# Altium PCB micromouse.PcbDoc (part 1 of 2)
Units mil, origin at the board's own origin, x right, y up, seen from the top; angles counter-clockwise.
Board outline 2757.75 x 3935.86 mil, 2 copper layers (Top, Bottom); 175 components, 116 nets, 552 pads, 234 vias.
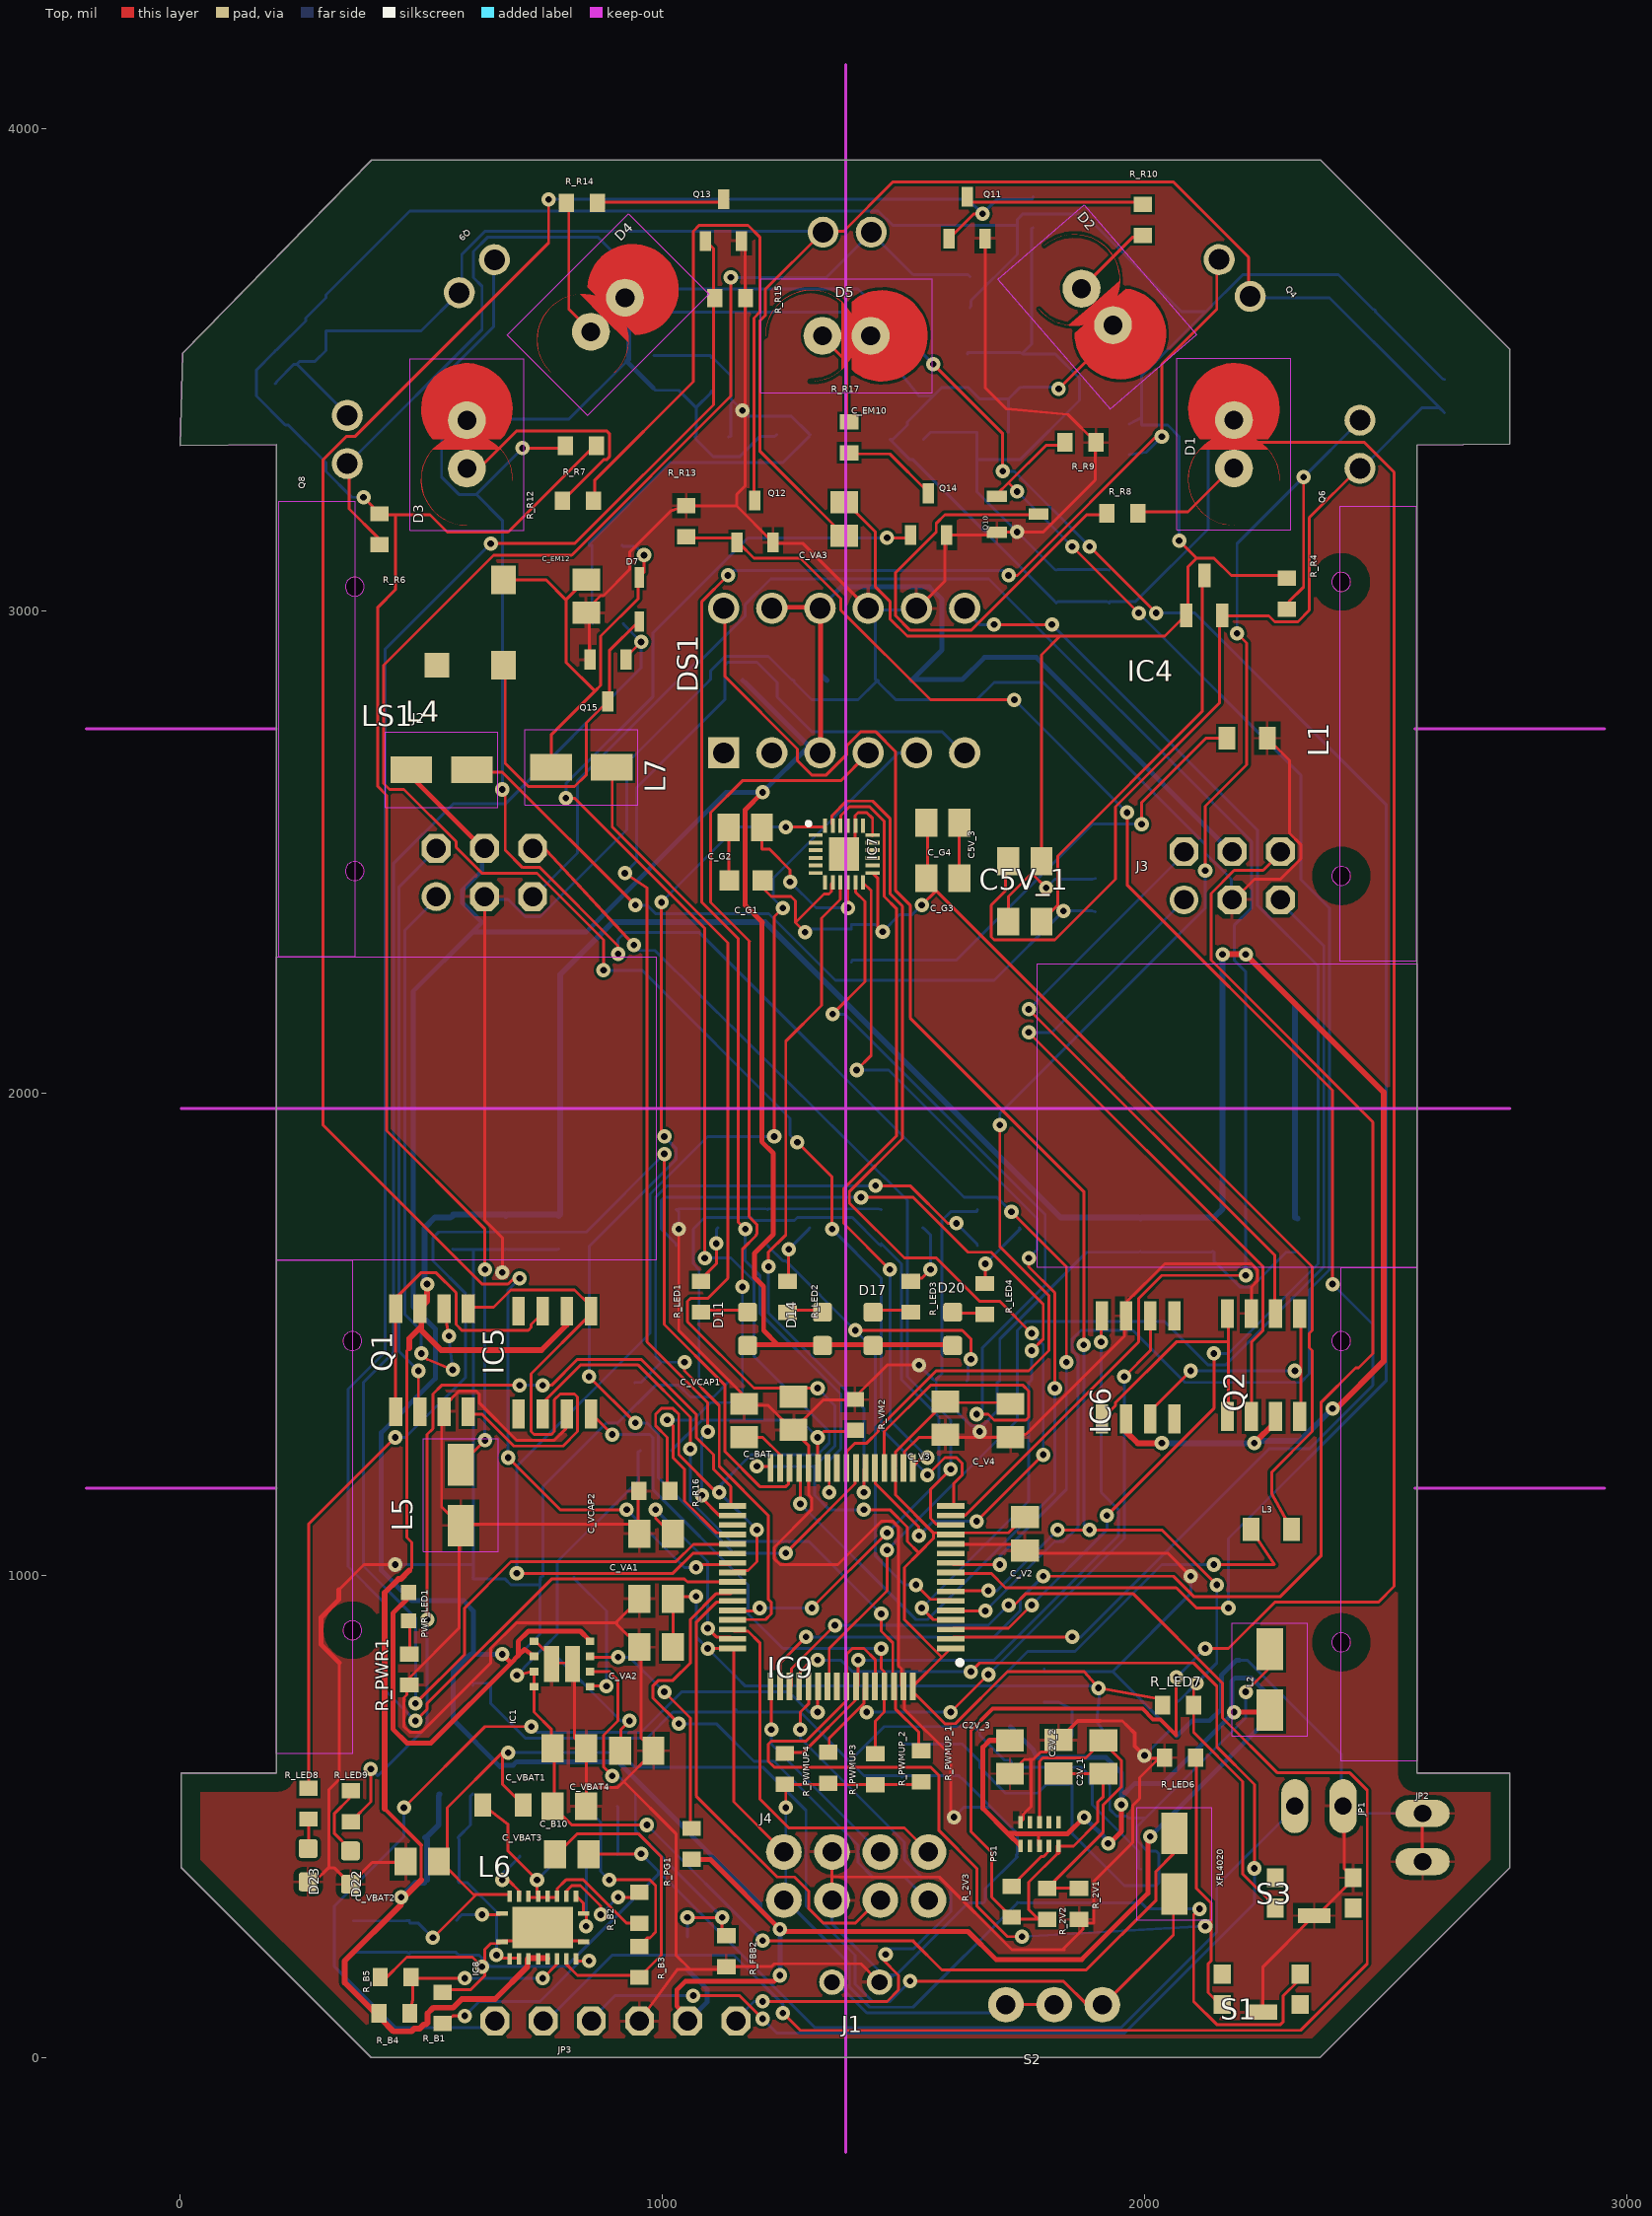
[diagram p0: Top view]
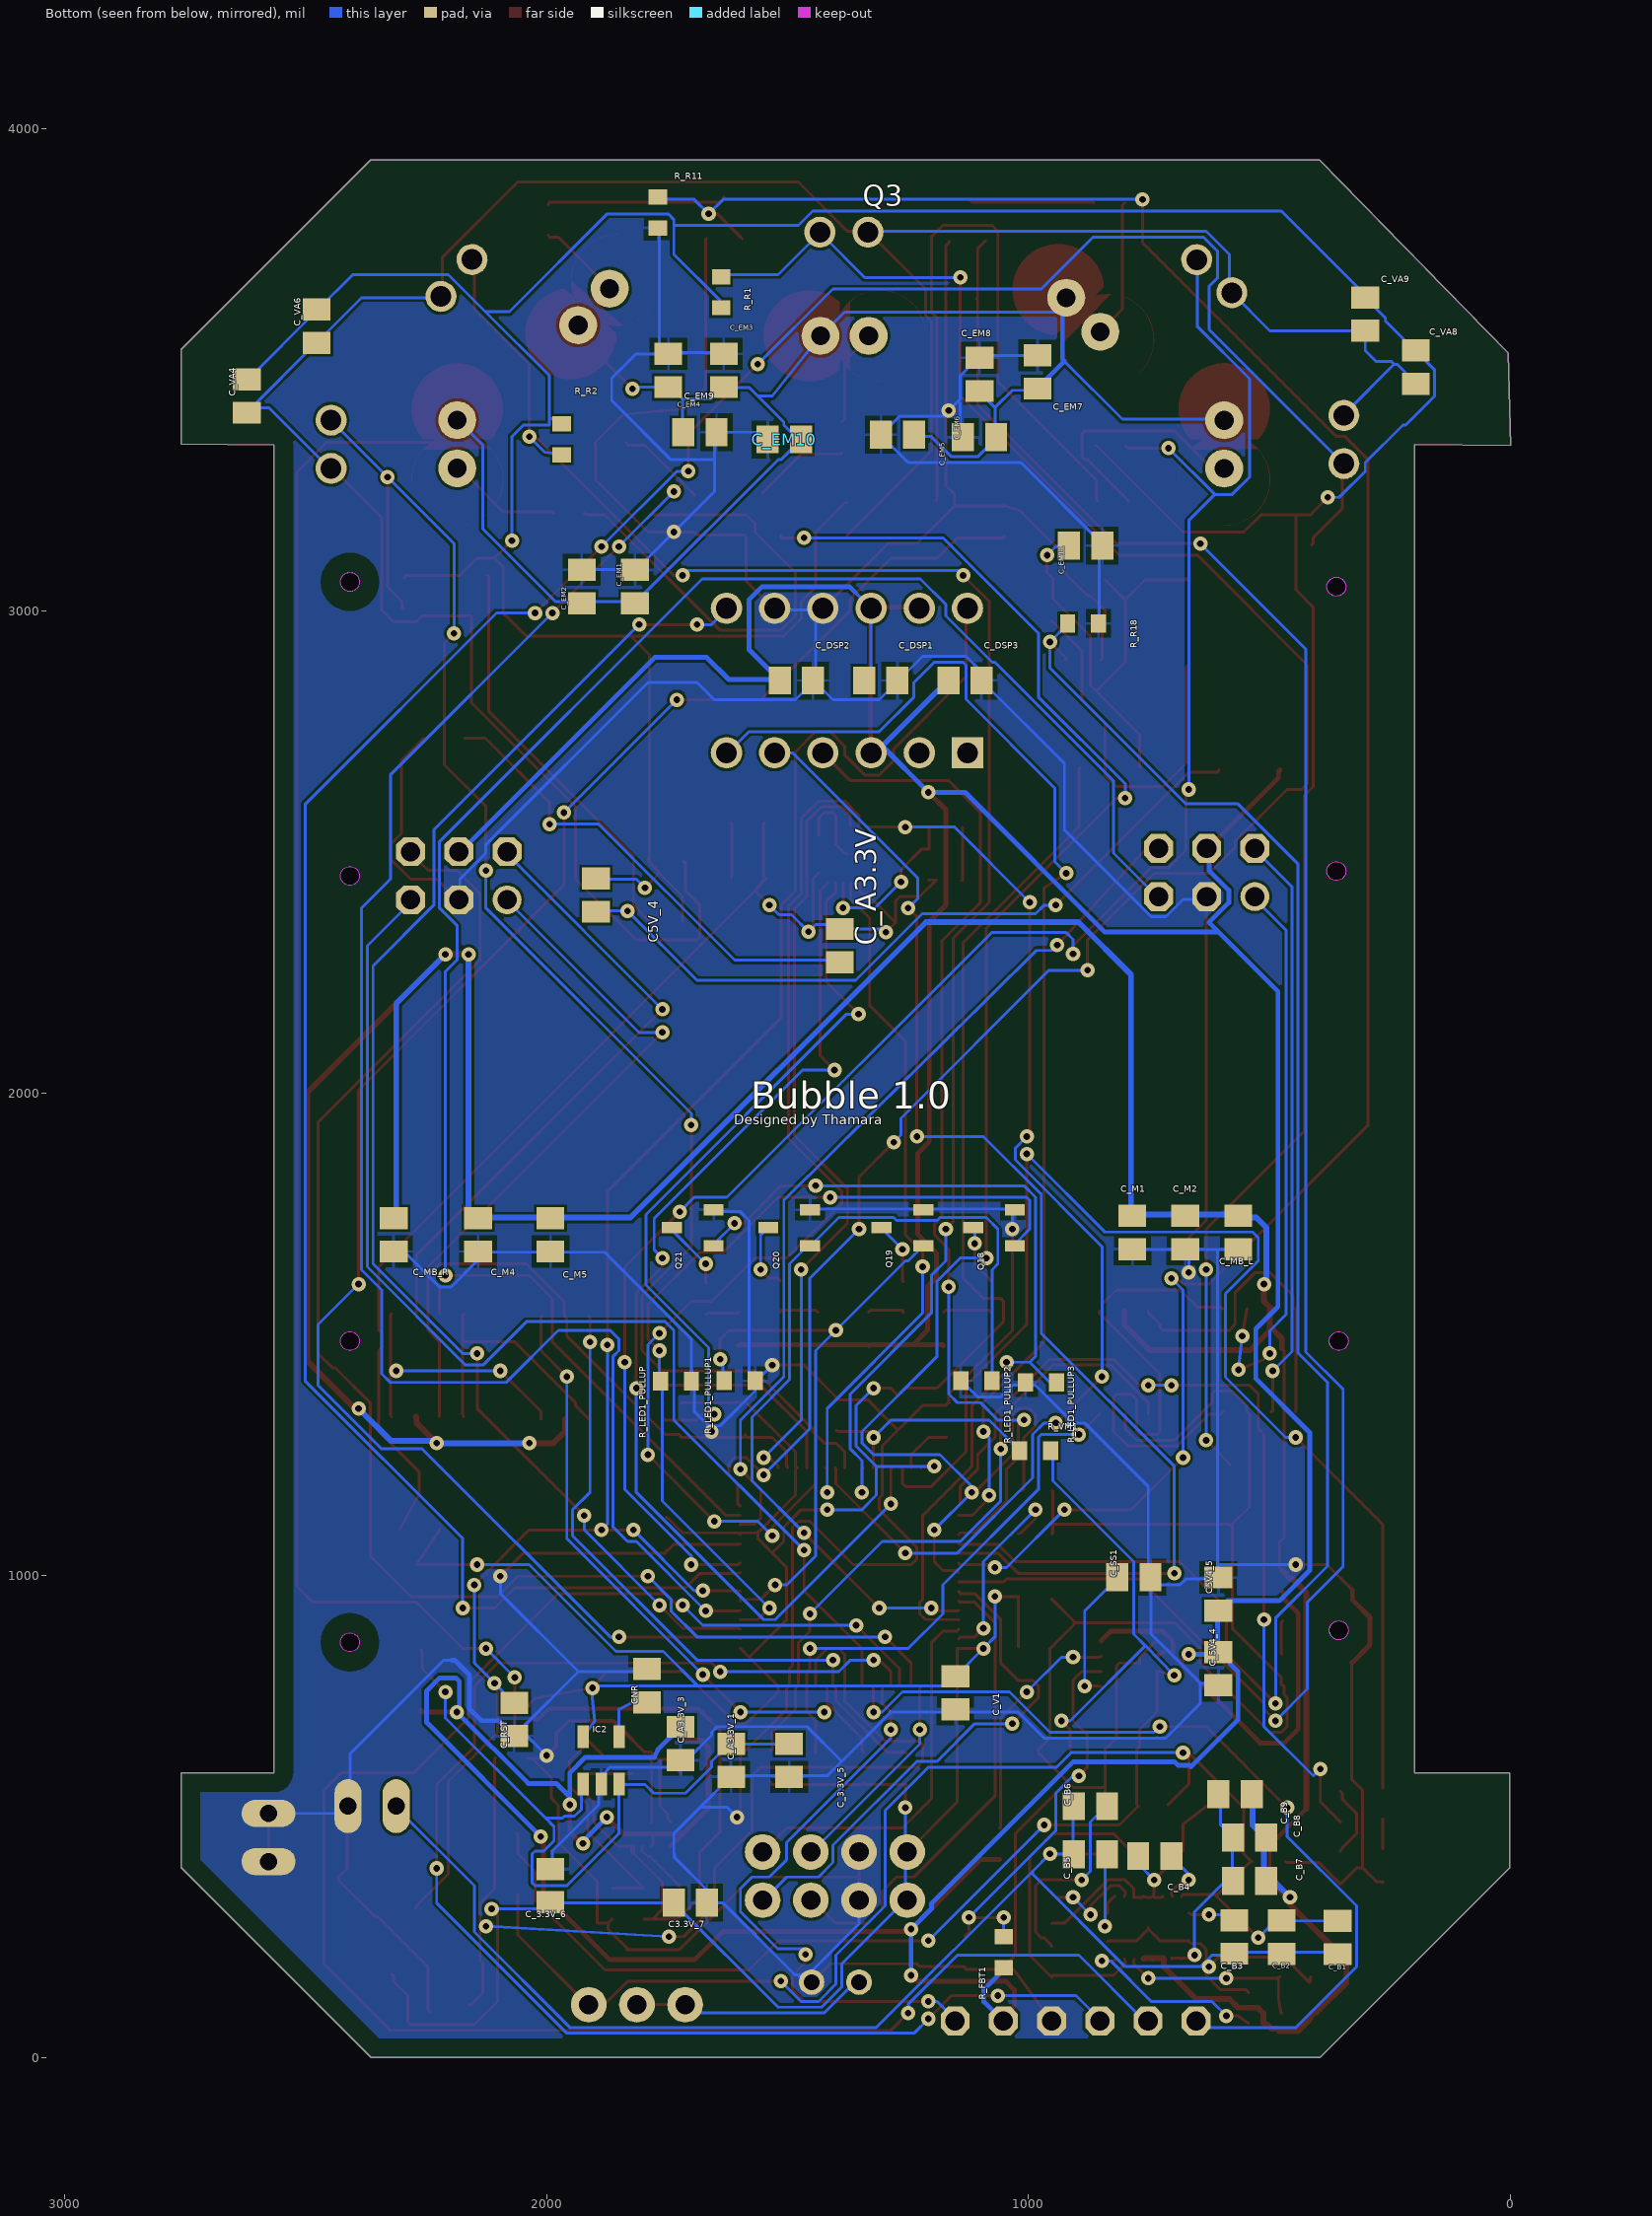
[diagram p1: Bottom view, seen from below]

## Layer stack, top to bottom
Top Solder: solder mask 0.4, Solder Resist, Dk 3.5
Top: signal copper 1.378
Dielectric 1: dielectric 12.6, FR-4, Dk 4.8
Bottom: signal copper 1.378
Bottom Solder: solder mask 0.4, Solder Resist, Dk 3.5

## Board outline
199.29,590.55 1.85,590.55 1.85,393.7 395.55,0 2364.05,0 2757.75,393.7 2757.75,590.55 2565.31,590.55 2565.31,3344.6 2757.75,3346.45 2757.75,3543.3 2365.15,3935.86 396.65,3935.86 5,3535.31 0,3343.62 199.17,3346.22
cut-out: 2407.83,841.46 ccw(c2407.83,861.14) 2427.51,861.14 ccw(c2407.83,861.14) 2407.83,880.83 ccw(c2407.83,861.14) 2388.14,861.14 ccw(c2407.83,861.14)
cut-out: 2407.83,1466.38 ccw(c2407.83,1486.06) 2427.51,1486.06 ccw(c2407.83,1486.06) 2407.83,1505.74 ccw(c2407.83,1486.06) 2388.14,1486.06 ccw(c2407.83,1486.06)
cut-out: 356.77,1466.38 ccw(c356.77,1486.06) 376.45,1486.06 ccw(c356.77,1486.06) 356.77,1505.74 ccw(c356.77,1486.06) 337.08,1486.06 ccw(c356.77,1486.06)
cut-out: 356.77,866.46 ccw(c356.77,886.14) 376.45,886.14 ccw(c356.77,886.14) 356.77,905.83 ccw(c356.77,886.14) 337.08,886.14 ccw(c356.77,886.14)
cut-out: 361.77,3031.18 ccw(c361.77,3050.86) 381.45,3050.86 ccw(c361.77,3050.86) 361.77,3070.55 ccw(c361.77,3050.86) 342.08,3050.86 ccw(c361.77,3050.86)
cut-out: 361.77,2441.26 ccw(c361.77,2460.94) 381.45,2460.94 ccw(c361.77,2460.94) 361.77,2480.62 ccw(c361.77,2460.94) 342.08,2460.94 ccw(c361.77,2460.94)
cut-out: 2407.83,2431.26 ccw(c2407.83,2450.94) 2427.51,2450.94 ccw(c2407.83,2450.94) 2407.83,2470.62 ccw(c2407.83,2450.94) 2388.14,2450.94 ccw(c2407.83,2450.94)
cut-out: 2407.83,3041.18 ccw(c2407.83,3060.86) 2427.51,3060.86 ccw(c2407.83,3060.86) 2407.83,3080.55 ccw(c2407.83,3060.86) 2388.14,3060.86 ccw(c2407.83,3060.86)

## Design rules (kind name [scope] priority, off if disabled: settings)
BoardOutlineClearance mdCopperDimension [All] p1: gap=10 ignorepadtopadclearanceinfootprint=FALSE except(0: Arc-SplitContinuation Track-SplitContinuation SMDPad-SplitContinuation THPad-SplitContinuation Via-SplitContinuation Fill-SplitContinuation Poly-SplitContinuation Region-SplitContinuation Text-SplitContinuation; 40: Poly-OutlineEdge Poly-CavityEdge Poly-CutoutEdge Poly-SplitBarrior)
Clearance "Clearance (Same Net)" [All] p1: gap=6 ignorepadtopadclearanceinfootprint=FALSE
Clearance [All] p2: gap=6 ignorepadtopadclearanceinfootprint=FALSE
HoleSize [All] p1: absolutevalues=TRUE maxlimit=100000 minlimit=13.78 maxpercent=80.000 minpercent=20.000
HoleToHoleClearance mdDrill [All] p1: gap=6 allowstackedmicrovias=TRUE
MinimumSolderMaskSliver [All] p1 off: minsoldermaskwidth=10
PasteMaskExpansion mlMinCreamFrame [All] p1: expansion=0
PolygonConnect PolygonConnect_For_PolygonThermal_ON_Width60000_Gap100000 [InPolygonClass('PolygonThermal_ON_Width60000_Gap100000') vs Not IsVia] p1: connectstyle=Relief reliefconductorwidth=6 reliefentries=4 polygonreliefangle="90 Angle" airgapwidth=10
PolygonConnect ThermalVias [IsVia] p2: connectstyle=Direct reliefconductorwidth=10 reliefentries=4 polygonreliefangle="90 Angle" airgapwidth=10
PolygonConnect [All] p3: connectstyle=Relief reliefconductorwidth=10 reliefentries=4 polygonreliefangle="90 Angle" airgapwidth=10
RoutingVias [All] p1: holewidth=13.78 width=29.78 viastyle="Through Hole" minholewidth=13.78 minwidth=29.78 maxholewidth=100 maxwidth=100
SolderMaskExpansion mlMinStopFrame [All] p1: expansion=4 istentingtop=FALSE
Width [All] p1: maxlimit=10 minlimit=6 preferedwidth=6
26 further rules are at their usual default settings.

## Classes and differential pairs
polygon class PolygonThermal_ON_Width60000_Gap100000: Polygon_1_Net_GND Polygon_2_Net_GND

## Components (designator, comment, footprint, x,y, rotation, side; value= is the part's Value field where it differs from the comment)
C2V_1 "22uf" CAPC2012X110 1821.49,623.85 r270 top
C2V_2 "120pf" CAPC2012X110 1914.41,623.15 r90 top
C2V_3 "4.7uf" CAPC2012X110 1720.71,623.15 r90 top
C3.3V_7 "10uf" CAPC2012X110 1701.85,321.3 r0 bottom
C5V4_5 "47uF" CAPC2012X110 606.85,961.3 r90 bottom
C5V_1 "0.1uf" CAPC2012X110 1751.85,2356.3 r0 top
C5V_3 "0.1uf" CAPC2012X110 1751.85,2481.3 r0 top
C5V_4 "0.1uf" CAPC2012X110 1897.52,2411.14 r270 bottom
C_3.3V_5 "10uf" CAPC2012X110 1496.85,616.3 r90 bottom
C_3.3V_6 "0.1uf" CAPC2012X110 1991.85,356.3 r270 bottom
C_5V4_4 "0.1uF" CAPC2012X110 606.85,806.3 r90 bottom
C_A3.3V "2.2uf" CAPC2012X110 1391.85,2306.3 r90 bottom
C_A3.3V_1 "0.1uf" CAPC2012X110 1616.85,616.3 r90 bottom
C_A3.3V_3 "0.1uf" CAPC2012X110 1721.85,651.3 r90 bottom
C_B1 "47uf" CAPC2012X110 358.93,248.81 r270 bottom
C_B2 "0.1uf" CAPC2012X110 475.39,249.56 r270 bottom
C_B3 "0.1uf" CAPC2012X110 573.54,249.84 r90 bottom
C_B4 "0.1uf" CAPC2012X110 738.34,417.83 r180 bottom
C_B5 "2.2uf" CAPC2012X110 871.85,421.3 r180 bottom
C_B6 "470 pf" CAPC2012X110 871.85,521.3 r180 bottom
C_B7 "0.1uf" CAPC2012X110 541.85,366.3 r0 bottom
C_B8 "47uf" CAPC2012X110 541.85,456.3 r0 bottom
C_B9 "47uf" CAPC2012X110 571.85,546.3 r0 bottom
C_B10 "22 pf" CAPC2012X110 811.85,421.3 r180 top
C_BAT "2.2uF" CAPC2012X110 1271.85,1336.3 r270 top
C_DSP1 "10uf" CAPC2012X110 1306.85,2856.3 r180 bottom
C_DSP2 "0.1uf" CAPC2012X110 1481.85,2856.3 r180 bottom
C_DSP3 "10uf" CAPC2012X110 1131.85,2856.3 r180 bottom
C_EM1 "4.7uF" CAPC2012X110 1816.85,3051.3 r90 bottom
C_EM2 "0.1uF" CAPC2012X110 1926.85,3051.3 r90 bottom
C_EM3 "0.1uF" CAPC2012X110 1632.4,3499.44 r90 bottom
C_EM4 "4.7uF" CAPC2012X110 1747.4,3499.44 r90 bottom
C_EM5 "0.1uF" CAPC2012X110 1271.85,3366.3 r0 bottom
C_EM6 "4.7uF" CAPC2012X110 1101.85,3361.3 r0 bottom
C_EM7 "0.1uF" CAPC2012X110 981.85,3496.3 r90 bottom
C_EM8 "4.7uF" CAPC2012X110 1101.85,3491.3 r90 bottom
C_EM9 "4.7uF" CAPC2012X110 1681.85,3371.3 r180 bottom
C_EM10 "0.1uF" CAPC2012X110 1506.85,3356.3 r0 bottom
C_EM11 "10uF" CAPC2012X110 881.85,3136.3 r180 bottom
C_EM12 "0.1uF" CAPC2012X110 841.85,3031.3 r90 top
C_G1 "" C0603K 1173.5,2441.65 r0 top
C_G2 "0.1uF" CAPC2012X110 1171.85,2551.3 r180 top
C_G3 "0.1uF" CAPC2012X110 1581.85,2446.3 r0 top
C_G4 "2.2uF" CAPC2012X110 1581.85,2561.3 r0 top
C_M1 "0.1uF" CAPC2012X110 785,1711.3 r270 bottom
C_M2 "4.7uF" CAPC2012X110 675,1711.3 r90 bottom
C_M4 "4.7uF" CAPC2012X110 2141.85,1706.3 r90 bottom
C_M5 "0.1uF" CAPC2012X110 1991.85,1706.3 r270 bottom
C_MB_L "100uF" CAPC2012X110 565,1711.3 r90 bottom
C_MB_R "100uF" CAPC2012X110 2316.85,1706.3 r90 bottom
C_RST "0.1uF" CAPC2012X110 2066.85,701.3 r270 bottom
C_SS1 "3300pF" CAPC2012X110 781.85,996.3 r0 bottom
C_V1 "0.1uF" CAPC2012X110 1151.85,756.3 r90 bottom
C_V2 "0.1uF" CAPC2012X110 1751.85,1086.3 r270 top
C_V3 "0.1uF" CAPC2012X110 1586.85,1326.3 r270 top
C_V4 "0.1uF" CAPC2012X110 1721.85,1321.3 r270 top
C_VA1 "2.2uF" CAPC2012X110 986.85,951.3 r180 top
C_VA2 "0.1uF" CAPC2012X110 986.85,851.3 r180 top
C_VA3 "2.2uF" CAPC2012X110 1376.85,3191.3 r90 top
C_VA4 "2.2uF" CAPC2012X110 2621.85,3446.3 r90 bottom
C_VA6 "2.2uF" CAPC2012X110 2476.85,3591.3 r90 bottom
C_VA8 "2.2uF" CAPC2012X110 196.85,3506.3 r90 bottom
C_VA9 "2.2uF" CAPC2012X110 301.85,3616.3 r90 bottom
C_VBAT1 "0.1uf" CAPC2012X110 806.85,641.3 r0 top
C_VBAT2 "0.1uf" CAPC2012X110 501.85,406.3 r180 top
C_VBAT3 "0.1uf" CAPC2012X110 806.85,521.3 r180 top
C_VBAT4 "47uf" CAPC2012X110 946.85,636.3 r180 top
C_VCAP1 "2.2uF" CAPC2012X110 1169.64,1321.3 r270 top
C_VCAP2 "2.2uF" CAPC2012X110 986.85,1086.3 r180 top
CNR "0.1uf" CAPC2012X110 1791.85,771.3 r270 bottom
D1 "SFH_4545" DIO_SFH_4545 2185.35,3346.45 r90 top
D2 "SFH_4545" DIO_SFH_4545 1901.85,3631.3 r310.8 top
D3 "SFH_4545" DIO_SFH_4545 594.45,3346.14 r90 top
D4 "SFH_4545" DIO_SFH_4545 886.85,3615 r45 top
D5 "SFH_4545" DIO_SFH_4545 1381.85,3571.3 r0 top
D7 "1N4148WSQ-13-F" SOD2513X120N 951.85,3024.44 r270 top
D11 "" LED-0603 1176.85,1511.3 r90 top
D14 "" LED-0603 1331.85,1511.3 r90 top
D17 "" LED-0603 1436.85,1511.3 r90 top
D20 "" LED-0603 1601.85,1511.3 r90 top
D22 "" LED-0603 353.15,393.89 r270 top
D23 "" LED-0603 265,398.89 r270 top
DS1 "HCMS-2903" DIPS762W64P254L1778H508Q12N 1126.85,2706.3 r90 top
IC1 "LMZ21701SILT" LMZ21701SILT 791.85,816.3 r180 top
IC2 "TPS73633MDBVREPG4" SOT95P280X145-5N 1886.57,616.18 r90 bottom
IC4 "MCP1700T-5002E_TT" SOT95P237X112-3N 2123.93,3033.07 r90 top
IC5 "UCC27524DR" SOIC127P600X175-8N#1 776.85,1441.3 r90 top
IC6 "UCC27524DR" SOIC127P600X175-8N#1 1986.85,1431.3 r270 top
IC7 "MPU-6500" QFN40P300X300X95-25N 1376.85,2496.3 r0 top
IC8 "TPS61088RHLT" BQ24031IRHLRQ1 751.85,269.41 r270 top
IC9 "STM32F405RGT6V" QFP50P1200X1200X160-64N 1371.85,996.3 r180 top
J1 "3A/250V" B2B-XH-A 1351.85,156.3 r0 top
J2 "" MA03-2 630.71,2458.03 r0 top
J3 "" MA03-2 2181.85,2451.3 r0 top
J4 "" 2X4 1401.85,376.3 r0 top
JP1 "" JP1 2361.85,521.3 r90 top
JP2 "" JP1 2576.85,456.3 r0 top
JP3 "" 1X06 902.48,75.7 r180 top
L1 "10 uH" INDC2009X120 2212.57,2736.65 r180 top
L2 "4.7 uH" L4035M 2260.08,783.66 r90 top
L3 "10uH" INDC2009X120 2262.78,1095.74 r0 top
L4 "4.7 uH" L4035M 541.85,2671.3 r0 top
L5 "4.7 uH" L4035M 581.85,1166.3 r90 top
L6 "2.2 uH" INDC2009X120 669.22,523.85 r180 top
L7 "4.7 uH" L4035M 831.85,2676.3 r0 top
LS1 "SMT-0540-S-R" SMT0540SR 606.85,2976.3 r90 top
PS1 "TPSM82821SILR" TPSM82821SILR 1782,463.15 r90 top
PWR_LED1 "GREEN" CHIPLED_0603 473.15,935.19 r180 top
Q1 "ZXMHC3F381N8TC" SOIC127P600X175-8N#2 521.85,1446.3 r90 top
Q2 "ZXMHC3F381N8TC" SOIC127P600X175-8N#2 2246.85,1436.3 r270 top
Q3 "TEFT4300" TEFT4300 1383.11,3786.26 r180 bottom
Q4 "TEFT4300" TEFT4300 2186.85,3691.3 r310.1 top
Q6 "TEFT4300" TEFT4300 2446.85,3346.3 r270 top
Q8 "TEFT4300" TEFT4300 346.3,3356.14 r90 top
Q9 "TEFT4300" TEFT4300 615,3695 r223.2 top
Q10 "SSM3K324R" SOT95P240X88-3N 1736.85,3201.3 r0 top
Q11 "SSM3K324R" SOT95P240X88-3N 1631.85,3816.3 r90 top
Q12 "SSM3K324R" SOT95P240X88-3N 1191.85,3186.3 r90 top
Q13 "SSM3K324R" SOT95P240X88-3N 1126.85,3811.3 r90 top
Q14 "SSM3K324R" SOT95P240X88-3N 1551.85,3201.3 r90 top
Q15 "SSM3K324R" SOT95P240X88-3N 886.85,2856.3 r270 top
Q18 "SSM3K324R" SOT95P240X88-3N 1071.85,1721.3 r0 bottom
Q19 "SSM3K324R" SOT95P240X88-3N 1261.85,1721.3 r0 bottom
Q20 "SSM3K324R" SOT95P240X88-3N 1496.85,1721.3 r0 bottom
Q21 "SSM3K324R" SOT95P240X88-3N 1696.85,1721.3 r0 bottom
R_2V1 "100K" RESC1608X60 1864.09,318.85 r270 top
R_2V2 "233.33K" RESC1608X60 1797.79,318.85 r270 top
R_2V3 "52.5K" RESC1608X60 1724.21,323.15 r90 top
R_B1 "100K" RESC1608X60 544.05,102.84 r270 top
R_B2 "150K" RESC1608X60 952.04,310.3 r90 top
R_B3 "35.7K" RESC1608X60 952.2,198.39 r270 top
R_B4 "94.65K" RESC1608X60 443.94,91.3 r180 top
R_B5 "10K" RESC1608X60 446.6,166.81 r0 top
R_FBB2 "10k" RESC1608X60 1132.44,220.3 r90 top
R_FBT1 "52.5K" RESC1608X60 1051.85,218.39 r270 bottom
R_LED1 "330 ohm" RESC1608X60 1080.04,1578.26 r270 top
R_LED1_PULLUP "10k" RESC1608X60 1731.74,1402.95 r0 bottom
R_LED1_PULLUP1 "10k" RESC1608X60 1599.14,1403.66 r0 bottom
R_LED1_PULLUP2 "10k" RESC1608X60 1108.45,1403.93 r180 bottom
R_LED1_PULLUP3 "10k" RESC1608X60 974.56,1400.07 r180 bottom
R_LED2 "330 ohm" RESC1608X60 1259.68,1577.7 r270 top
R_LED3 "330 ohm" RESC1608X60 1515.39,1578.26 r270 top
R_LED4 "330 ohm" RESC1608X60 1668.58,1573.26 r270 top
R_LED6 "47K" RESC1608X60 2073.45,621.77 r180 top
R_LED7 "330 ohm" RESC1608X60 2069.56,730.67 r0 top
R_LED8 "1K" RESC1608X60 265.82,526.6 r270 top
R_LED9 "1K" RESC1608X60 353.62,521.05 r270 top
R_PG1 "10K" RESC1608X60 1060.27,442.9 r90 top
R_PWMUP3 "10k" RESC1608X60 1343.62,601.05 r270 top
R_PWMUP4 "10k" RESC1608X60 1253.62,598.45 r270 top
R_PWMUP_1 "10k" RESC1608X60 1536.85,604.2 r270 top
R_PWMUP_2 "10k" RESC1608X60 1441.57,598.1 r270 top
R_PWR1 "1K" RESC1608X60 474.92,804.95 r90 top
R_R1 "4.7k" RESC1608X60 1637.87,3661.76 r90 bottom
R_R2 "1.8k" RESC1608X60 1968.62,3356.54 r270 bottom
R_R4 "1.8k" RESC1608X60 2295.08,3036.54 r270 top
R_R6 "1.8k" RESC1608X60 413.03,3169.89 r270 top
R_R7 "1.8k" RESC1608X60 830.99,3343.22 r180 top
R_R8 "0.75 ohm" RESC1608X60 1953.81,3202.99 r0 top
R_R9 "10k" RESC1608X60 1866.89,3350.19 r180 top
R_R10 "0.75 ohm" RESC1608X60 1996.41,3811.76 r270 top
R_R11 "10k" RESC1608X60 1768.97,3827.29 r90 bottom
R_R12 "0.75 ohm" RESC1608X60 824.91,3228.93 r180 top
R_R13 "10k" RESC1608X60 1049.37,3186.96 r270 top
R_R14 "0.75 ohm" RESC1608X60 832.68,3846.81 r180 top
R_R15 "10k" RESC1608X60 1140.46,3649.48 r180 top
R_R16 "10k" RESC1608X60 983.39,1175.31 r0 top
R_R17 "0.75 ohm" RESC1608X60 1387.44,3360.83 r90 top
R_R18 "10k" RESC1608X60 887.09,2974.52 r0 bottom
R_VM1 "4.7k" RESC1608X60 986.74,1258.46 r180 bottom
R_VM2 "10k" RESC1608X60 1398.86,1332.84 r270 top
S1 "KMR211G" KMR211G 2241.85,141.3 r180 top
S2 "" SWITCH_SPDT_PTH_11.6X4.0MM 1812.48,109.44 r90 top
S3 "KMR211G" KMR211G 2351.85,341.3 r180 top
XFL4020 "4.7 uH" L4035M 2061.93,401.93 r270 top

## Footprints (in the part's own frame and the unit in brackets; to place one, negate y for a bottom-side part, rotate by r counter-clockwise, add the part's x,y. Pads: shape width x height; smd on the part's side, far side on the other; paste and mask are expansions set on the pad)
1X06 [mil] "1X06"
  oct 60x60 / inner round 55.43 / far side oct 60x60 hole 40: 1(-250,0) 2(-150,0) 3(-50,0) 4(50,0) 5(150,0) 6(250,0)
2X4 [mil] "2X4"
  round 74 hole 40: 1(-150,-50) 2(-150,50) 3(-50,-50) 4(-50,50) 5(50,-50) 6(50,50) 7(150,-50) 8(150,50)
B2B-XH-A [mil] "B2B-XH-A"
  round 53.07 hole 33.07: 1(0,0) 2(98.43,0)
BQ24031IRHLRQ1 [mm] "BQ24031IRHLRQ1"
  rect 0.24x0.6 smd: 1(-0.75,2.15) 10(-0.75,-2.15) 11(0.75,-2.15) 20(0.75,2.15)
  rect 0.6x0.24 smd: 2(-1.65,1.75) 3(-1.65,1.25) 4(-1.65,0.75) 5(-1.65,0.25) 6(-1.65,-0.25) 7(-1.65,-0.75) 8(-1.65,-1.25) 9(-1.65,-1.75) 12(1.65,-1.75) 13(1.65,-1.25) 14(1.65,-0.75) 15(1.65,-0.25) 16(1.65,0.25) 17(1.65,0.75) 18(1.65,1.25) 19(1.65,1.75)
  rect 2.19x3.19 smd: 21(0,0)
C0603K [mm] "C0603K"
  rect 1.05x1.08 smd: 1(-0.875,0) 2(0.875,0)
CAPC2012X110 [mil] "CAPC2012X110"
  rect 45.85x57.69 smd: 1(-34.46,0) 2(34.46,0)
CHIPLED_0603 [mil] "CHIPLED_0603"
  rect 31.5x31.5 smd: A(0,-29.53) C(0,29.53)
DIO_SFH_4545 [mm] "DIO_SFH_4545"
  round 2 hole 1: A(1.27,0) C(-1.27,0)
  Top region: 0.269,0.06 0.269,1.79 1.012,2.247 1.87,2.401 1.87,2.401 1.895,2.401 3.041,2.093 3.9,1.275 4.266,0.147 4.266,0.147 4.127,-0.808 3.624,-1.632 2.838,-2.193 1.895,-2.4 1.895,-2.4 1.895,-2.4 1.918,-2.4 1.034,-2.256 0.269,-1.79 0.269,-1.79
  Top region: -0.269,0.06 -0.269,1.79 -1.012,2.247 -1.87,2.401 -1.87,2.401 -1.895,2.401 -3.083,2.068 -3.951,1.191 -4.271,0 -4.27,0 -4.01,1.098 -3.277,1.957 -2.234,2.388 -1.109,2.297 -0.149,1.703 0.435,0.737 0.515,-0.389 0.073,-1.428 -0.794,-2.151 -1.895,-2.401 -1.895,-2.401 -1.895,-2.401 -1.918,-2.4 -1.034,-2.256 -0.269,-1.79 -0.269,-1.79
  Top keep-out lines w0.05: -4.52,3 4.52,3 4.52,-3 -4.52,-3 -4.52,3
DIPS762W64P254L1778H508Q12N [mm] "DIPS762W64P254L1778H508Q12N"
  rect 1.65x1.65 / inner round 1.524 / far side rect 1.65x1.65 hole 1.1: 1(0,0)
  round 1.65 hole 1.1: 2(0,-2.54) 3(0,-5.08) 4(0,-7.62) 5(0,-10.16) 6(0,-12.7) 7(7.62,-12.7) 8(7.62,-10.16) 9(7.62,-7.62) 10(7.62,-5.08) 11(7.62,-2.54) 12(7.62,0)
INDC2009X120 [mil] "INDC2009X120"
  rect 34.48x47.65 smd: 1(-42.02,0) 2(42.02,0)
JP1 [mil] "JP1"
  oval 112x56 hole 36: 1(0,-50) 2(0,50)
KMR211G [mil] "KMR211G"
  rect 35.43x39.37 smd: 1(80.71,31.5) 2(80.71,-31.5) 3(-80.71,31.5) 4(-80.71,-31.5)
  rect 66.93x31.5 smd: 5(0,47.24)
L4035M [mil] "L4035M"
  rect 86.61x55.12 smd: 1(-62.99,0) 2(62.99,0)
  Top keep-out lines w2: -117.05,78.07 -117.05,-78.07 117.05,-78.07 117.05,78.07 -117.05,78.07
LED-0603 [mm] "LED-0603"
  rrect30% 1x1 smd: A(-0.877,0) C(0.877,0)
LMZ21701SILT [mil] "LMZ21701SILT"
  rect 17.72x15.75 smd: 1(-58.07,47.24) 2(-58.07,15.75) 3(-58.07,-15.75) 4(-58.07,-47.24) 5(58.07,-47.24) 6(58.07,-15.75) 7(58.07,15.75) 8(58.07,47.24)
  rect 31.5x74.8 smd: 9(21.65,0) 10(-21.65,0)
MA03-2 [mil] "MA03-2"
  round 60 hole 40: 1(-100,-50)
  oct 60x60 / inner round 55.43 / far side oct 60x60 hole 40: 2(-100,50) 3(0,-50) 4(0,50) 5(100,-50) 6(100,50)
QFN40P300X300X95-25N [mm] "QFN40P300X300X95-25N"
  rect 0.75x0.2 smd: 1(-1.5,1) 2(-1.5,0.6) 3(-1.5,0.2) 4(-1.5,-0.2) 5(-1.5,-0.6) 6(-1.5,-1) 13(1.5,-1) 14(1.5,-0.6) 15(1.5,-0.2) 16(1.5,0.2) 17(1.5,0.6) 18(1.5,1)
  rect 0.2x0.75 smd: 7(-1,-1.5) 8(-0.6,-1.5) 9(-0.2,-1.5) 10(0.2,-1.5) 11(0.6,-1.5) 12(1,-1.5) 19(1,1.5) 20(0.6,1.5) 21(0.2,1.5) 22(-0.2,1.5) 23(-0.6,1.5) 24(-1,1.5)
  rect 1.59x1.75 smd: 25(0,0)
  silkscreen extent -1.97,1.5 -1.77,1.7
QFP50P1200X1200X160-64N [mil] "QFP50P1200X1200X160-64N"
  rect 57.09x11.81 smd: 1(-226.38,147.64) 2(-226.38,127.95) 3(-226.38,108.27) 4(-226.38,88.58) 5(-226.38,68.9) 6(-226.38,49.21) 7(-226.38,29.53) 8(-226.38,9.84) 9(-226.38,-9.84) 10(-226.38,-29.53) 11(-226.38,-49.21) 12(-226.38,-68.9) 13(-226.38,-88.58) 14(-226.38,-108.27) 15(-226.38,-127.95) 16(-226.38,-147.64) 33(226.38,-147.64) 34(226.38,-127.95) 35(226.38,-108.27) 36(226.38,-88.58) 37(226.38,-68.9) 38(226.38,-49.21) 39(226.38,-29.53) 40(226.38,-9.84) 41(226.38,9.84) 42(226.38,29.53) 43(226.38,49.21) 44(226.38,68.9) 45(226.38,88.58) 46(226.38,108.27) 47(226.38,127.95) 48(226.38,147.64)
  rect 11.81x57.09 smd: 17(-147.64,-226.38) 18(-127.95,-226.38) 19(-108.27,-226.38) 20(-88.58,-226.38) 21(-68.9,-226.38) 22(-49.21,-226.38) 23(-29.53,-226.38) 24(-9.84,-226.38) 25(9.84,-226.38) 26(29.53,-226.38) 27(49.21,-226.38) 28(68.9,-226.38) 29(88.58,-226.38) 30(108.27,-226.38) 31(127.95,-226.38) 32(147.64,-226.38) 49(147.64,226.38) 50(127.95,226.38) 51(108.27,226.38) 52(88.58,226.38) 53(68.9,226.38) 54(49.21,226.38) 55(29.53,226.38) 56(9.84,226.38) 57(-9.84,226.38) 58(-29.53,226.38) 59(-49.21,226.38) 60(-68.9,226.38) 61(-88.58,226.38) 62(-108.27,226.38) 63(-127.95,226.38) 64(-147.64,226.38)
  silkscreen extent -250,172 -240,182
RESC1608X60 [mil] "RESC1608X60"
  rect 31.44x38.34 smd: 1(-32.09,0) 2(32.09,0)
SMT0540SR [mil] "SMT0540SR"
  rect 59.06x51.18 smd: 1(-88.58,-62.99) 2(88.58,-62.99)
  rect 51.18x51.18 smd: 3(-88.58,74.8)
SOD2513X120N [mil] "SOD2513X120N"
  rect 42.32x19.69 smd: 1(-45.75,0) 2(45.75,0)
SOIC127P600X175-8N#1 [mm] "SOIC127P600X175-8N"
  rect 1.528x0.65 smd: 1(-2.711,1.905) 2(-2.711,0.635) 3(-2.711,-0.635) 4(-2.711,-1.905) 5(2.711,-1.905) 6(2.711,-0.635) 7(2.711,0.635) 8(2.711,1.905)
SOIC127P600X175-8N#2 [mm] "SOIC127P600X175-8N"
  rect 1.525x0.7 smd: 1(-2.712,1.905) 2(-2.712,0.635) 3(-2.712,-0.635) 4(-2.712,-1.905) 5(2.712,-1.905) 6(2.712,-0.635) 7(2.712,0.635) 8(2.712,1.905)
SOT95P237X112-3N [mm] "SOT95P237X112-3N"
  rect 1.25x0.65 smd: 1(-1.05,0.95) 2(-1.05,-0.95) 3(1.05,0)
SOT95P240X88-3N [mil] "SOT95P240X88-3N"
  rect 41.34x23.62 smd: 1(-43.31,37.4) 2(-43.31,-37.4) 3(43.31,0)
SOT95P280X145-5N [mil] "SOT95P280X145-5N"
  rect 47.24x23.62 smd: 1(-49.21,37.4) 2(-49.21,0) 3(-49.21,-37.4) 4(49.21,-37.4) 5(49.21,37.4)
SWITCH_SPDT_PTH_11.6X4.0MM [mil] "SWITCH_SPDT_PTH_11.6X4.0MM"
  round 74 hole 40: 1(0,100) 2(0,0) 3(0,-100)
TEFT4300 [mm] "TEFT4300"
  round 1.635 hole 1.09: 1(-1.27,0) 2(1.27,0)
TPSM82821SILR [mm] "TPSM82821SILR"
  rect 0.65x0.25 smd: 1(-0.625,1) 2(-0.625,0.5) 3(-0.625,0) 4(-0.625,-0.5) 5(-0.625,-1) 6(0.625,-1) 7(0.625,-0.5) 8(0.625,0) 9(0.625,0.5) 10(0.625,1)

## Part data
C2V_1 C2V_2 C2V_3 C3.3V_7 C5V4_5 C5V_1 C5V_3 C5V_4 C_3.3V_5 C_3.3V_6 C_5V4_4 C_A3.3V C_A3.3V_1 C_A3.3V_3 C_B1 C_B2 C_B3 C_B4 C_B5 C_B6 C_B7 C_B8 C_B9 C_B10 C_BAT C_DSP1 C_DSP2 C_DSP3 C_EM1 C_EM2 C_EM3 C_EM4 C_EM5 C_EM6 C_EM7 C_EM8 C_EM9 C_EM10 C_EM11 C_EM12 C_G2 C_G3 C_G4 C_M1 C_M2 C_M4 C_M5 C_MB_L C_MB_R C_RST C_SS1 C_V1 C_V2 C_V3 C_V4 C_VA1 C_VA2 C_VA3 C_VA4 C_VA6 C_VA8 C_VA9 C_VBAT1 C_VBAT2 C_VBAT3 C_VBAT4 C_VCAP1 C_VCAP2 CNR: library part CAPC2012X110, PackageName=CAPC2012X110
C_G1: library part C0603K, PackageName=C0603K
D1 D2 D3 D4 D5: library part DIO_SFH_4545, PackageName=DIO_SFH_4545
D7: library part SOD2513X120N, PackageName=SOD2513X120N
D11 D14 D17 D20 D22 D23: library part LED-0603, PackageName=LED-0603
DS1: library part DIPS762W64P254L1778H508Q12N, PackageName=DIPS762W64P254L1778H508Q12N
IC2: library part SOT95P280X145-5N, PackageName=SOT95P280X145-5N
IC4: library part SOT95P237X112-3N, PackageName=SOT95P237X112-3N
IC5 IC6 Q1 Q2: library part SOIC127P600X175-8N, PackageName=SOIC127P600X175-8N
IC7: library part QFN40P300X300X95-25N, PackageName=QFN40P300X300X95-25N
IC8: library part BQ24031IRHLRQ1, PackageName=BQ24031IRHLRQ1
IC9: library part QFP50P1200X1200X160-64N, PackageName=QFP50P1200X1200X160-64N
J1: library part B2B-XH-A, PackageName=B2B-XH-A
J2 J3: library part MA03-2, PackageName=MA03-2
J4: library part 2X4, PackageName=2X4
JP1 JP2: library part JP1, PackageName=JP1
JP3: library part 1X06, PackageName=1X06
L1 L3 L6: library part INDC2009X120, PackageName=INDC2009X120
L2 L4 L5 L7 XFL4020: library part L4035M, PackageName=L4035M
LS1: library part SMT0540SR, PackageName=SMT0540SR
PWR_LED1: library part CHIPLED_0603, PackageName=CHIPLED_0603
Q10 Q11 Q12 Q13 Q14 Q15 Q18 Q19 Q20 Q21: library part SOT95P240X88-3N, PackageName=SOT95P240X88-3N
R_2V1 R_2V2 R_2V3 R_B1 R_B2 R_B3 R_B4 R_B5 R_FBB2 R_FBT1 R_LED1 R_LED1_PULLUP R_LED1_PULLUP1 R_LED1_PULLUP2 R_LED1_PULLUP3 R_LED2 R_LED3 R_LED4 R_LED6 R_LED7 R_LED8 R_LED9 R_PG1 R_PWMUP3 R_PWMUP4 R_PWMUP_1 R_PWMUP_2 R_PWR1 R_R1 R_R2 R_R4 R_R6 R_R7 R_R8 R_R9 R_R10 R_R11 R_R12 R_R13 R_R14 R_R15 R_R16 R_R17 R_R18 R_VM1 R_VM2: library part RESC1608X60, PackageName=RESC1608X60
S2: library part SWITCH_SPDT_PTH_11.6X4.0MM, PackageName=SWITCH_SPDT_PTH_11.6X4.0MM
IC1: PackageName=LMZ21701SILT
PS1: PackageName=TPSM82821SILR
Q3 Q4 Q6 Q8 Q9: PackageName=TEFT4300
S1 S3: PackageName=KMR211G

## Free pads (board coordinates)
  round 39.37 hole 39.37 unplated: MH1(361.77,2460.94) MH2(361.77,3050.86) MH3(2407.83,3060.86) MH4(2407.83,2450.94) MH5(2407.83,1486.06) MH6(2407.83,861.14) MH7(356.77,886.14) MH8(356.77,1486.06)

## Via types
v1: diameter 29.78/29.78 (per signal layer), hole 13.78, Top to Bottom, 234 vias

## Nets (pads, with @x,y where several pads share a name; then routed paths per layer and width w, separated by ;. In a path a pad name is that pad's centre, name@x,y a point inside that pad or via, vN(x,y) a via of type N, cw(c..) or ccw(c..) an arc to the next point about the centre after c; other vN are vias at no path point)
2V: C2V_1.2 C2V_2.1 C_EM1.1 C_EM2.1 C_EM3.1 C_EM4.1 C_EM5.1 C_EM6.1 C_EM7.1 C_EM8.1 C_EM9.1 C_EM10.1 D1.A D2.A D3.A D4.A D5.A PS1.5 R_2V2.2 R_2V3.1 | length 8344.9
  Top w6: 1661.85,700.3 1639.85,678.3 1639.85,468.5 1682.72,425.63 1682.72,332.54 1724.21,291.05 1728.5,286.76 R_2V2.2@1779.8,286.76 ; R_2V2.2@1797.79,286.76 R_2V2.2@1779.8,286.76 ; 1821.37,425.07 1759.8,363.5 1759.8,306.76 R_2V2.2@1779.8,286.76 ; PS1.5@1821.37,438.54 1852.45,438.54 1902.41,488.5 1902.41,529.15 1914.41,541.15 C2V_2.1@1914.41,588.69 1822.2,588.68 C2V_1.2@1821.49,589.39 ; v1(1821.85,3461.3) 1934.52,3573.97 D2.A@1934.52,3593.45 ; 2065.85,668.5 v1(2065.85,788.3) ; v1(2125.85,848.3) 2173.85,848.3 2269.85,944.3 2484.7,944.3 2517.85,977.44 2517.85,3288.3 2455.85,3350.3 2227.85,3350.3 2185.85,3392.3 D1.A@2185.35,3396.45
  Top w8: 1661.85,700.3 1685.05,723.5 1995.59,723.5 2017.6,701.49 2032.85,701.49 2065.85,668.5
  Top w10: 1821.37,425.07 PS1.5@1821.37,438.54
  Bottom w6: D3.A@594.45,3396.14 595.85,3398.3 805.85,3398.3 925.85,3518.3 ; C_EM7.1@979.85,3464.3 C_EM7.1@981.85,3461.84 985.85,3458.3 1033.85,3458.3 1069.85,3422.3 ; C_EM8.1@1101.85,3456.84 1099.85,3452.3 1069.85,3422.3 ; C_EM5.1@1237.39,3366.3 1231.85,3362.3 1201.85,3362.3 1159.85,3320.3 1105.85,3320.3 1069.85,3356.3 C_EM6.1@1067.39,3361.3 1069.85,3362.3 1069.85,3422.3 ; C_EM9.1@1716.31,3371.3 1717.85,3371.3 1717.85,3440.3 ; v1(1821.85,3461.3) 1816.85,3466.3 1811.85,3466.3 1810.53,3464.98 C_EM4.1@1747.4,3464.98 1741.85,3464.3 1717.85,3440.3 ; v1(2065.85,788.3) v1(2125.85,848.3) ; D1.A@2185.35,3396.45 2179.85,3392.3 2131.85,3344.3 2131.85,3170.3 1981.85,3020.3 1927.85,3020.3 C_EM2.1@1926.85,3016.84 1921.85,3020.3 1819.85,3020.3 C_EM1.1@1816.85,3016.84 1813.85,3020.3 1519.85,3314.3 1513.85,3314.3 1471.85,3356.3 C_EM10.1@1472.39,3356.3 1477.85,3356.3 1507.85,3386.3 1507.85,3392.3 1561.85,3446.3 ; D4.A@925.85,3620.3 D4.A@922.21,3650.36 925.85,3650.3 D4.A@925.85,3620.3 ; D4.A@925.85,3620.3 929.8,3620.3 1381.85,3620.3 1429.85,3572.3 D5.A@1431.85,3571.3 1531.85,3446.3 1561.85,3446.3 ; 1561.85,3446.3 1579.85,3464.3 1627.85,3464.3 C_EM3.1@1632.4,3464.98 1633.85,3464.3 1657.85,3440.3 1717.85,3440.3
  Bottom w10: D4.A@929.8,3620.3 929.8,3522.25 925.85,3518.3 C_EM7.1@979.85,3464.3
3.3V: C3.3V_7.2 C_3.3V_6.2 C_BAT.1 C_V1.2 C_V2.1 C_V3.1 C_V4.1 C_VA1.1 C_VA2.1 IC2.5 IC9.1 IC9.13 IC9.19 IC9.32 IC9.48 IC9.64 J4.1 J4.2 L3.1 L7.2 R_LED7.1 R_PWMUP3.2 R_PWMUP4.2 R_PWMUP_1.2 R_PWMUP_2.2 S1.4 | length 8749
  Top w6: L7.2@894.84,2676.3 895.85,2672.3 895.85,2552.3 1135.85,2312.3 1135.85,1616.3 1093.85,1574.3 1057.85,1574.3 1051.85,1568.3 1051.85,1526.3 1189.85,1388.3 1255.85,1388.3 1267.85,1376.3 C_BAT.1@1271.85,1370.76 1273.85,1376.3 1285.85,1388.3 v1(1321.85,1388.3) ; C_VA2.1@1021.31,851.3 1021.85,854.3 1021.85,950.3 C_VA1.1@1021.31,951.3 1021.85,956.3 v1(1069.85,956.3) ; v1(1093.85,848.3) 1141.85,848.3 IC9.48@1145.47,848.66 1147.85,848.3 1147.85,530.3 J4.2@1251.85,426.3 ; v1(1195.85,1226.3) 1219.85,1226.3 IC9.32@1224.21,1222.68 ; R_PWMUP4.2@1253.62,566.36 R_PWMUP4.2@1255.85,566.3 ; v1(1255.85,518.3) R_PWMUP4.2@1255.85,566.3 ; v1(1417.85,1136.3) 1471.85,1136.3 1507.85,1100.3 1507.85,1070.3 1531.85,1046.3 ; R_PWMUP_1.2@1536.85,572.11 1531.85,566.3 1441.85,566.3 R_PWMUP_2.2@1441.57,566.01 1435.85,566.3 1345.85,566.3 R_PWMUP3.2@1343.62,568.96 1339.85,566.3 R_PWMUP4.2@1255.85,566.3 ; IC9.1@1598.23,848.66 1597.85,848.3 1579.85,830.3 ; 1599.85,692.3 1585.85,692.3 ; C_V4.1@1721.85,1355.76 1717.85,1358.3 1591.85,1358.3 C_V3.1@1586.85,1360.76 1585.85,1358.3 1483.85,1256.3 1483.85,1226.3 IC9.19@1480.12,1222.68 1483.85,1220.3 1483.85,1166.3 1561.85,1088.3 ; C_V2.1@1751.85,1120.76 1747.85,1118.3 1717.85,1088.3 1603.85,1088.3 IC9.13@1598.23,1084.88 1597.85,1088.3 1561.85,1088.3 ; R_LED7.1@2035.85,728.3 R_LED7.1@2037.47,730.67 2022.58,745.55 v1(1904.6,766.45) 1875,800.55 1715.88,800.55 1607.74,692.41 1585.96,692.41 1585.85,692.3 ; v1(2113.85,308.3) 2101.85,296.3 2101.85,116.3 2149.85,68.3 2281.85,68.3 2287.85,74.3 2287.85,128.3 2317.85,158.3 2317.85,170.3 S1.4@2322.56,172.8 ; v1(2143.85,1022.3) 2269.44,1022.3 L3.1@2220.76,1095.74 ; 1531.85,1046.3 1561.85,1076.3 1561.85,1088.3 ; 1531.85,1046.3 1501.85,1016.3 1501.85,908.3 1579.85,830.3 ; 1579.85,830.3 1519.85,770.3 IC9.64@1519.49,769.92 1519.85,764.3 1519.85,758.3 1585.85,692.3
  Bottom w6: v1(1069.85,956.3) 1069.85,872.3 v1(1093.85,848.3) 1147.85,794.3 C_V1.2@1151.85,790.76 1153.85,788.3 1171.85,770.3 1685.85,770.3 ; v1(1195.85,1226.3) 1315.85,1226.3 ; J4.1@1251.85,326.3 J4.1@1255.85,326.3 ; v1(1255.85,518.3) 1255.85,428.3 J4.2@1251.85,426.3 1255.85,422.3 J4.1@1255.85,326.3 ; v1(1321.85,1388.3) 1357.85,1352.3 1357.85,1268.3 1315.85,1226.3 ; v1(1417.85,1136.3) 1345.85,1136.3 1315.85,1166.3 1315.85,1226.3 ; IC2.5@1923.97,665.39 1900.46,697.52 1905.61,746.31 1905.61,765.43 v1(1904.6,766.45) 1900.75,770.3 1685.85,770.3 ; v1(2113.85,308.3) 2005.85,308.3 1993.85,320.3 C_3.3V_6.2@1991.85,321.84 1987.85,320.3 1741.85,320.3 C3.3V_7.2@1736.31,321.3 1735.85,320.3 1519.85,104.3 1429.85,104.3 1387.85,146.3 1387.85,194.3 J4.1@1255.85,326.3 ; v1(2143.85,1022.3) 2035.85,1022.3 1855.85,842.3 1757.85,842.3 1685.85,770.3
3.3V_RE: C5V_3.1 C_VA3.1 C_VA4.1 C_VA6.1 C_VA8.1 C_VA9.1 IC4.2 Q3.2 Q4.2 Q6.2 Q8.2 Q9.2 | length 5715.4
  Top w6: C_VA3.1@1376.85,3156.84 1375.85,3158.3 1201.85,3332.3 1201.85,3602.3 1213.85,3614.3 1213.85,3668.3 1327.85,3782.3 Q3.2@1333.11,3786.26 1333.85,3788.3 1375.85,3788.3 1477.85,3890.3 2059.85,3890.3 2215.85,3734.3 2215.85,3656.3 Q4.2@2219.05,3653.05 ; C5V_3.1@1717.39,2481.3 1711.85,2480.3 1711.85,2420.3 1681.85,2390.3 1681.85,2324.3 1687.85,2318.3 1813.85,2318.3 1939.85,2444.3 1939.85,2594.3 2155.85,2810.3 2155.85,2990.3 IC4.2@2161.33,2991.73 2161.85,2990.3 2257.85,2990.3 2269.85,2978.3 2317.85,2978.3 2341.85,3002.3 2341.85,3194.3 2443.85,3296.3 Q6.2@2446.85,3296.3
  Bottom w6: C_VA8.1@196.85,3471.84 199.85,3476.3 235.85,3512.3 241.85,3512.3 ; Q8.2@346.3,3406.14 343.85,3410.3 241.85,3512.3 ; Q9.2@578.55,3660.77 499.61,3581.83 C_VA9.1@301.85,3581.84 301.85,3540.55 279.8,3518.5 248.05,3518.5 241.85,3512.3 ; Q9.2@583.85,3662.3 583.85,3740.3 631.85,3788.3 1327.85,3788.3 Q3.2@1333.11,3786.26 ; Q4.2@2219.05,3653.05 2221.85,3650.3 2383.85,3650.3 2473.85,3560.3 C_VA6.1@2476.85,3556.84 2479.85,3554.3 2617.85,3416.3 C_VA4.1@2621.85,3411.84 2611.3,3422.37 2575.93,3422.37 2449.85,3296.3 Q6.2@2446.85,3296.3
  Bottom w10: Q9.2@578.55,3660.77 580.08,3662.3 Q9.2@583.85,3662.3
5V: C2V_3.2 C5V4_5.1 C_5V4_4.2 C_A3.3V_3.2 C_DSP1.1 C_DSP2.1 C_DSP3.1 D11.A D14.A D17.A D20.A DS1.3 DS1.10 DS1.11 IC1.4 IC1.6 J2.4 J3.4 JP3.2 L2.1 L4.1 PS1.1 PS1.3 PWR_LED1.A R_FBT1.2 R_PG1.1 | length 12573.7
  Top w6: DS1.10@1326.85,3006.3 1327.85,3005.3 DS1.10@1327.85,3002.3 ; 1779.8,463.96 1779.8,440.74 PS1.3@1782,438.54
  Top w10: PWR_LED1.A@473.15,964.72 469.85,962.3 469.85,950.3 440.85,921.3 440.85,681.3 469.85,652.3 519.85,652.3 685.85,818.3 ; L4.1@478.86,2671.3 481.85,2666.3 481.85,2654.3 625.85,2510.3 J2.4@630.71,2508.03 ; v1(667.85,836.3) 685.85,818.3 ; IC1.6@733.78,832.05 713.87,846.32 700.85,833.3 ; IC1.4@849.92,863.54 847.85,866.3 829.85,884.3 721.85,884.3 700.85,863.3 700.85,833.3 ; JP3.2@1052.48,75.7 1051.85,80.3 1051.85,84.3 1029.85,106.3 1029.85,140.3 1047.85,158.3 1231.85,158.3 v1(1243.85,170.3) ; R_PG1.1@1060.27,410.81 1063.85,410.3 1099.85,410.3 v1(1243.85,266.3) 1248.85,261.3 1633.85,261.3 1691.85,203.3 1869.85,203.3 2006.85,340.3 2006.85,453.3 v1(2011.85,458.3) ; D11.A@1176.85,1476.77 1177.85,1478.3 1239.8,1478.3 ; 1207.85,2354.3 1205.96,2356.19 ; v1(1207.85,2624.3) 1171.85,2588.3 1171.85,2390.3 1205.96,2356.19 ; DS1.11@1226.85,3006.3 1231.85,3008.3 1321.85,3008.3 DS1.10@1326.85,3006.3 ; DS1.3@1326.85,2706.3 1327.85,2708.3 DS1.10@1327.85,3002.3 ; D20.A@1601.85,1476.77 1597.85,1478.3 1441.85,1478.3 D17.A@1436.85,1476.77 1435.85,1478.3 1333.85,1478.3 D14.A@1331.85,1476.77 1327.85,1478.3 1239.8,1478.3 ; 1678.91,657.61 1664.8,643.5 1664.8,516.37 1716.24,464.94 ; PS1.1@1742.63,438.54 1716.24,464.94 ; v1(1874.8,498.5) 1840.26,463.96 1779.8,463.96 1733.16,463.96 1732.18,464.94 1716.24,464.94 ; v1(1924.46,443.84) 1924.8,443.5 1926.85,443.5 1951.85,468.5 v1(1951.85,524.3) ; v1(2185.85,716.3) 2257.85,716.3 L2.1@2260.08,720.67 ; 685.85,818.3 700.85,833.3 ; 1205.96,2356.19 1205.96,1899.57 1229.8,1875.73 1229.8,1707.25 1190.85,1668.3 1190.85,1618.3 1209.8,1599.34 1209.8,1508.3 1239.8,1478.3
  Top w12: 1678.91,657.61 C2V_3.2@1720.71,657.61
  Bottom w6: C_DSP1.1@1339.85,2858.3 1339.85,2857.76 C_DSP1.1@1341.31,2856.3 1326.85,2870.76 DS1.10@1326.85,3006.3 1359.43,3038.87
  Bottom w10: J2.4@630.71,2508.03 625.85,2504.3 625.85,2462.3 584.85,2421.3 584.85,2395.3 625.85,2354.3 605.85,2334.3 ; v1(667.85,836.3) 607.85,836.3 C_5V4_4.2@606.85,840.76 ; R_FBT1.2@1051.85,186.3 1051.85,182.3 1092.85,141.3 1092.85,115.3 1057.85,80.3 JP3.2@1052.48,75.7 ; C_DSP3.1@1166.31,2856.3 1171.85,2852.3 DS1.3@1303.85,2720.3 ; v1(1243.85,170.3) v1(1243.85,266.3) 1201.85,308.3 1201.85,319.3 907.64,613.5 697.67,613.5 690.57,606.41 665.96,606.41 662.85,603.3 565.85,700.3 565.85,800.3 601.85,836.3 C_5V4_4.2@606.85,840.76 ; C_DSP1.1@1329.8,2867.81 C_DSP1.1@1341.31,2856.3 ; 1359.43,3038.87 1370.85,3050.3 1553.85,3050.3 1579.8,3024.34 1579.8,2919.78 C_DSP2.1@1516.31,2856.3 1519.85,2858.3 1621.85,2858.3 1667.85,2904.3 1775.85,2904.3 2175.85,2504.3 2179.85,2504.3 J3.4@2181.85,2501.3 ; C_A3.3V_3.2@1721.85,685.76 1768.54,639.07 1776.33,622.3 1919.85,622.3 1951.85,590.3 v1(1951.85,524.3) 1951.85,540.55 1979.8,568.5 2038.05,568.5 v1(2185.85,716.3) 2180.85,721.3 2180.85,780.3 2187.85,787.3 2221.85,787.3 2248.85,760.3 2248.85,695.3 v1(2011.85,458.3) ; v1(1874.8,498.5) 1924.46,448.84 v1(1924.46,443.84) ; 605.85,2334.3 482.85,2211.3 482.85,1557.3 528.85,1511.3 528.85,1408.3 416.85,1296.3 416.85,1010.3 479.85,947.3 588.12,947.3 C5V4_5.1@606.85,926.84 607.85,926.3 607.85,842.3 C_5V4_4.2@606.85,840.76 ; 605.85,2334.3 841.85,2334.3 1131.85,2624.3 v1(1207.85,2624.3) DS1.3@1303.85,2720.3 ; DS1.3@1303.85,2720.3 DS1.3@1326.85,2706.3 1321.85,2702.3 DS1.3@1303.85,2720.3
A3.3V: C_A3.3V.2 C_G1.2 C_G3.1 C_G4.1 IC7.8 IC7.13 L3.2 | length 2654.7
  Top w6: C_G1.2@1207.95,2441.65 1191.5,2442.64 1225.85,2408.3 1266.85,2408.3 1275.85,2399.3 1275.85,2354.3 ; v1(1295.85,2334.3) 1275.85,2354.3 ; IC7.8@1353.23,2437.24 1350.41,2434.43 1350.41,2418.75 1345.14,2413.48 1335.03,2413.48 1275.85,2354.3 ; IC7.13@1435.91,2456.93 1446.97,2445.86 1446.85,2444.71 1446.85,2345.3 v1(1456.85,2335.3) ; v1(1537.85,2390.3) C_G3.1@1567.85,2420.3 ; C_G4.1@1547.39,2561.3 1549.85,2558.3 1549.85,2450.3 C_G3.1@1547.39,2446.3 ; L3.2@2304.8,1095.74 2263.85,1169.1 2263.85,1214.3 2347.85,1298.3 2347.85,1466.3 2341.85,1472.3 2341.85,1502.3 2347.85,1508.3 2347.85,1640.3 C_G3.1@1567.85,2420.3 ; C_G3.1@1547.39,2446.3 C_G3.1@1567.85,2420.3 ; C_G3.1@1547.39,2446.3 1543.85,2444.3 C_G3.1@1567.85,2420.3
  Bottom w6: v1(1295.85,2334.3) 1302.31,2340.76 C_A3.3V.2@1391.85,2340.76 1391.85,2350.3 1441.85,2350.3 v1(1456.85,2335.3) 1491.85,2370.3 1517.85,2370.3 v1(1537.85,2390.3)
AGND2: C5V_1.1 C5V_3.2 C5V_4.1 C_VA3.2 C_VA4.2 C_VA6.2 C_VA8.2 C_VA9.2 IC4.1 L5.2 R_R1.1 R_R2.1 R_R4.1 R_R6.1 R_R7.1 | length 8882.4
  Top w6: v1(379.85,3236.3) 409.85,3206.3 R_R6.1@413.03,3201.98 415.85,3200.3 445.85,3200.3 ; L5.2@581.85,1229.29 583.85,1232.3 v1(631.85,1280.3) ; v1(631.85,1634.3) 631.85,1718.3 427.85,1922.3 427.85,2618.3 409.85,2636.3 409.85,3008.3 445.85,3044.3 445.85,3200.3 ; R_R7.1@863.08,3343.22 859.85,3344.3 679.85,3164.3 553.85,3164.3 517.85,3200.3 445.85,3200.3 ; C_VA3.2@1376.85,3225.76 1381.85,3224.3 1441.85,3164.3 1441.85,3050.3 1471.85,3020.3 1471.85,2984.3 1507.85,2948.3 1824.8,2948.3 ; C5V_1.1@1717.39,2356.3 1717.85,2360.3 1717.85,2408.3 C5V_3.2@1765.85,2456.3 ; C5V_3.2@1789.85,2486.3 C5V_3.2@1786.31,2481.3 ; v1(1795.85,2426.3) C5V_3.2@1765.85,2456.3 ; v1(2071.85,3146.3) 2107.85,3110.3 ; R_R4.1@2295.08,3068.63 2293.85,3074.3 2179.85,3074.3 2143.85,3110.3 2107.85,3110.3 ; C5V_3.2@1765.85,2456.3 C5V_3.2@1786.31,2481.3 ; C5V_3.2@1765.85,2456.3 1789.85,2480.3 C5V_3.2@1786.31,2481.3 ; C5V_3.2@1786.31,2481.3 1786.31,2909.81 1824.8,2948.3 ; 1824.8,2948.3 2041.85,2948.3 2083.85,2990.3 IC4.1@2086.53,2991.73 2089.85,2996.3 2089.85,3092.3 2107.85,3110.3
  Bottom w6: v1(379.85,3236.3) 355.85,3236.3 301.85,3290.3 301.85,3308.3 223.85,3386.3 217.85,3386.3 157.85,3446.3 157.85,3500.3 193.85,3536.3 C_VA8.2@196.85,3540.76 199.85,3542.3 259.85,3602.3 259.85,3608.3 301.85,3650.3 C_VA9.2@301.85,3650.76 301.85,3656.3 475.85,3830.3 1447.85,3830.3 1477.85,3800.3 1735.85,3800.3 ; v1(631.85,1280.3) v1(631.85,1634.3) ; R_R1.1@1637.87,3629.67 1639.85,3632.3 1639.85,3644.3 1735.85,3740.3 1735.85,3800.3 ; v1(1795.85,2426.3) 1813.85,2444.3 1891.85,2444.3 C5V_4.1@1897.52,2445.6 ; R_R2.1@1968.62,3388.63 1993.85,3401.48 ; v1(2071.85,3146.3) 2071.85,3362.3 2047.85,3386.3 1993.85,3386.3 1993.85,3401.48 ; C_VA4.2@2621.85,3480.76 2617.85,3482.3 2479.85,3620.3 C_VA6.2@2476.85,3625.76 2473.85,3626.3 2401.85,3698.3 2203.85,3698.3 2126.93,3621.37 ; 1735.85,3800.3 1735.85,3812.3 1747.85,3824.3 1779.8,3824.3 1789.85,3824.3 1874,3824.3 2076.93,3621.37 2126.93,3621.37 ; 1993.85,3401.48 1993.85,3488.3 2126.93,3621.37
BOOT0: IC9.57 IC9.60 R_LED6.1 S1.1 | length 2186.1
  Top w6: IC9.60@1440.74,769.92 1441.85,770.3 1441.85,824.3 1417.85,848.3 1393.85,848.3 1381.85,836.3 1381.85,770.3 IC9.57@1381.69,769.92 1381.85,764.3 1381.85,740.3 1297.85,656.3 1225.85,656.3 1219.85,650.3 1219.85,614.3 1231.85,602.3 1555.85,602.3 1573.85,584.3 1573.85,470.3 1651.85,392.3 1651.85,314.3 1715.6,250.55 v1(1746,250.55) ; R_LED6.1@2105.55,621.77 2107.85,620.3 2107.85,350.3 2137.85,320.3 v1@2137.85,272.3 ; v1(2125.85,272.3) v1@2137.85,272.3 ; S1.1@2161.14,109.8 2155.85,110.3 2131.85,134.3 2131.85,194.3 2137.85,200.3 v1@2137.85,272.3
  Bottom w6: v1(1746,250.55) v1(2125.85,272.3)
BT_MODE: IC9.53 JP3.1 | length 1254.8
  Top w6: v1(1207.85,116.3) 1465.85,116.3 1489.85,140.3 1489.85,170.3 1457.35,202.8 1463,208.45 v1(1463,213.55) ; v1(1285.85,680.3) 1285.85,716.3 1303.85,734.3 1303.85,764.3 IC9.53@1302.95,769.92
  Bottom w6: JP3.1@1152.48,75.7 1153.85,80.3 1189.85,116.3 v1(1207.85,116.3) ; v1(1285.85,680.3) 1285.85,662.3 1501.85,446.3 1501.85,410.3 1537.85,374.3 1573.85,374.3 1597.85,350.3 1597.85,302.3 1520.85,225.3 1467.8,225.3 v1(1463,213.55)
BT_MS: IC9.54 JP3.6 | length 1818.2
  Top w6: v1(463.85,518.3) 631.85,686.3 v1(727.85,686.3) ; v1(1321.85,716.3) 1321.85,764.3 IC9.54@1322.64,769.92
  Bottom w6: v1(463.85,518.3) 463.85,458.3 319.85,314.3 319.85,188.3 445.85,62.3 637.85,62.3 649.85,74.3 JP3.6@652.48,75.7 ; v1(727.85,686.3) 739.85,674.3 955.85,674.3 1039.85,758.3 1261.85,758.3 1303.85,716.3 v1(1321.85,716.3)
BT_RX: IC9.51 JP3.5 | length 3769.1
  Top w6: v1(1249.85,92.3) 1285.85,56.3 2323.85,56.3 2461.85,194.3 2461.85,554.3 2425.85,590.3 2275.85,590.3 2161.85,704.3 2161.85,776.3 1975.85,962.3 1753.85,962.3 1729.85,938.3 v1(1717.85,938.3) ; IC9.51@1263.58,769.92 1267.85,770.3 1267.85,806.3 v1(1357.85,896.3)
  Bottom w6: JP3.5@752.48,75.7 757.85,74.3 895.85,212.3 1147.85,212.3 1249.85,110.3 v1(1249.85,92.3) ; v1(1357.85,896.3) 1675.85,896.3 v1(1717.85,938.3)
BT_TX: IC9.52 JP3.4 | length 2969
  Top w6: v1(1063.85,128.3) 1159.85,128.3 v1(1207.85,80.3) ; IC9.52@1283.27,769.92 1285.85,770.3 1285.85,800.3 1309.85,824.3 v1(1321.85,824.3) ; v1(1639.85,800.3) 1657.85,818.3 2101.85,818.3 2149.85,770.3 2149.85,644.3 2227.85,566.3 v1(2227.85,392.3)
  Bottom w6: JP3.4@852.48,75.7 853.85,80.3 901.85,128.3 v1(1063.85,128.3) ; v1(1207.85,80.3) 1237.85,50.3 1957.85,50.3 2227.85,320.3 v1(2227.85,392.3) ; v1(1321.85,824.3) 1369.85,824.3 1393.85,800.3 v1(1639.85,800.3)
BUZZER: IC9.37 Q15.1 R_R18.2 | length 3507.8
  Top w6: v1(487.85,734.3) 589.85,836.3 589.85,932.3 685.85,1028.3 1027.85,1028.3 1063.85,1064.3 1141.85,1064.3 IC9.37@1145.47,1065.2 ; Q15.1@924.25,2899.61 919.85,2900.3 v1(955.85,2936.3)
  Bottom w6: v1(487.85,734.3) 487.85,911.3 379.85,1019.3 379.85,1400.3 441.85,1462.3 441.85,2476.3 565.85,2600.3 673.85,2600.3 955.85,2882.3 v1(955.85,2936.3) 919.85,2972.3 R_R18.2@919.18,2974.52
CE: DS1.7 IC9.3 | length 2910.8
  Top w6: IC9.3@1598.23,888.03 1603.85,890.3 1717.85,890.3 v1(1765.85,938.3) ; v1(1687.85,2972.3) v1(1807.85,2972.3) ; v1(1921.85,1124.3) 2143.85,1346.3 v1(2143.85,1460.3)
  Bottom w6: DS1.7@1626.85,3006.3 1627.85,3002.3 1657.85,2972.3 v1(1687.85,2972.3) ; v1(1765.85,938.3) 1921.85,1094.3 v1(1921.85,1124.3) ; v1(1807.85,2972.3) 2233.85,2546.3 2233.85,2390.3 2359.85,2264.3 2359.85,1646.3 2173.85,1460.3 v1(2143.85,1460.3)
CLK: DS1.6 IC9.34 | length 2569
  Top w6: v1(922,2456.55) 967.85,2426.3 967.85,1484.3 1093.85,1358.3 v1(1093.85,1298.3) ; v1(1081.85,1166.3) 1081.85,1160.3 1117.85,1124.3 1141.85,1124.3 IC9.34@1145.47,1124.25
  Bottom w6: v1(922,2456.55) 946.15,2480.69 946.15,2633.6 1129.85,2817.3 1129.85,2888.3 1135.85,2894.3 1195.85,2894.3 1237.85,2852.3 1237.85,2822.3 1309.85,2750.3 1579.85,2750.3 1621.85,2708.3 DS1.6@1626.85,2706.3 ; v1(1081.85,1166.3) 1081.85,1286.3 v1(1093.85,1298.3)
DATA_IN: DS1.4 IC9.36 | length 2127.9
  Top w6: v1(1009.85,1322.3) 1021.85,1310.3 1021.85,1244.3 1045.85,1220.3 1045.85,1154.3 1111.85,1088.3 1141.85,1088.3 IC9.36@1145.47,1084.88 ; v1(1165.85,1598.3) 1165.85,1676.3 1193.93,1704.37 1193.93,1706.59 1195.74,1708.4 1195.74,1728.19 1179.8,1744.13 1179.8,2316.34 ; 1180.85,2315.3 1179.8,2316.34 ; DS1.4@1426.85,2706.3 1423.85,2702.3 1369.85,2648.3 1165.85,2648.3 1099.85,2582.3 1099.85,2396.3 1178.72,2317.42 1179.8,2316.34
  Bottom w6: v1(1009.85,1322.3) 1063.85,1322.3 1099.85,1358.3 1147.85,1358.3 1165.85,1376.3 v1(1165.85,1598.3)
DC_GND: C_B1.2 C_B2.2 C_B3.1 C_B5.1 C_B6.1 C_B10.1 IC8.11 IC8.20 IC8.21 JP1.2 R_B1.1 R_B5.1 | length 3417.2
  Top w6: R_B5.1@414.51,166.81 417.22,155.67 469.85,208.3 605.85,208.3 v1(625.85,188.3) v1@631.85,188.3 ; R_B1.1@544.05,134.93 548.85,140.3 601.85,140.3 631.85,170.3 v1@631.85,188.3 ; IC8.21@751.85,269.41 IC8.21@751.85,266.3 ; IC8.20@836.5,239.88 835.85,242.3 775.85,242.3 IC8.21@751.85,266.3 ; C_B10.1@846.31,421.3 847.85,422.3 v1(955.85,422.3) ; v1@631.85,188.3 631.85,224.3 643.85,236.3 661.85,236.3 IC8.11@667.2,239.88 667.85,242.3 727.85,242.3 IC8.21@751.85,266.3
  Bottom w6: C_B1.2@358.93,214.35 361.85,218.3 469.85,218.3 C_B2.2@475.39,215.1 475.85,218.3 571.85,218.3 C_B3.1@573.54,215.38 577.85,212.3 619.85,212.3 625.85,206.3 ; v1(625.85,188.3) 625.85,206.3 ; C_B5.1@906.31,421.3 C_B5.1@907.85,422.3 ; C_B6.1@906.31,521.3 907.85,518.3 C_B5.1@907.85,422.3 ; JP1.2@2311.85,521.3 2311.85,518.3 2149.85,356.3 2149.85,260.3 1951.85,62.3 1315.85,62.3 991.85,386.3 ; 625.85,206.3 643.85,188.3 799.85,188.3 991.85,380.3 991.85,386.3 ; C_B5.1@907.85,422.3 v1(955.85,422.3) 991.85,386.3
FANPWM: IC9.56
FSYNC: IC7.11 IC9.20 | length 1984.7
  Top w6: v1(1352.85,2164.3) 1419.85,2231.3 1419.85,2397.86 1400.47,2417.24 IC7.11@1400.47,2437.24 ; IC9.20@1460.43,1222.68 1459.85,1226.3 1459.85,1298.3 1555.85,1394.3 1747.85,1394.3 1759.85,1382.3 1759.85,1328.3 1753.85,1322.3 1687.85,1322.3 1675.85,1334.3 v1(1651.85,1334.3)
  Bottom w6: v1(1352.85,2164.3) 1377.85,2164.3 1793.85,1748.3 1793.85,1602.3 1663.85,1472.3 1663.85,1346.3 v1(1651.85,1334.3)